# Altium PCB PCB1.PcbDoc
Units mm, origin at the board's own origin, x right, y up, seen from the top; angles counter-clockwise.
Board outline 133.46 x 100.89 mm, 2 copper layers (Top Layer, Bottom Layer); 42 components, 54 nets, 182 pads, 5 vias.
Unrouted connection lines stored in the file: 5.
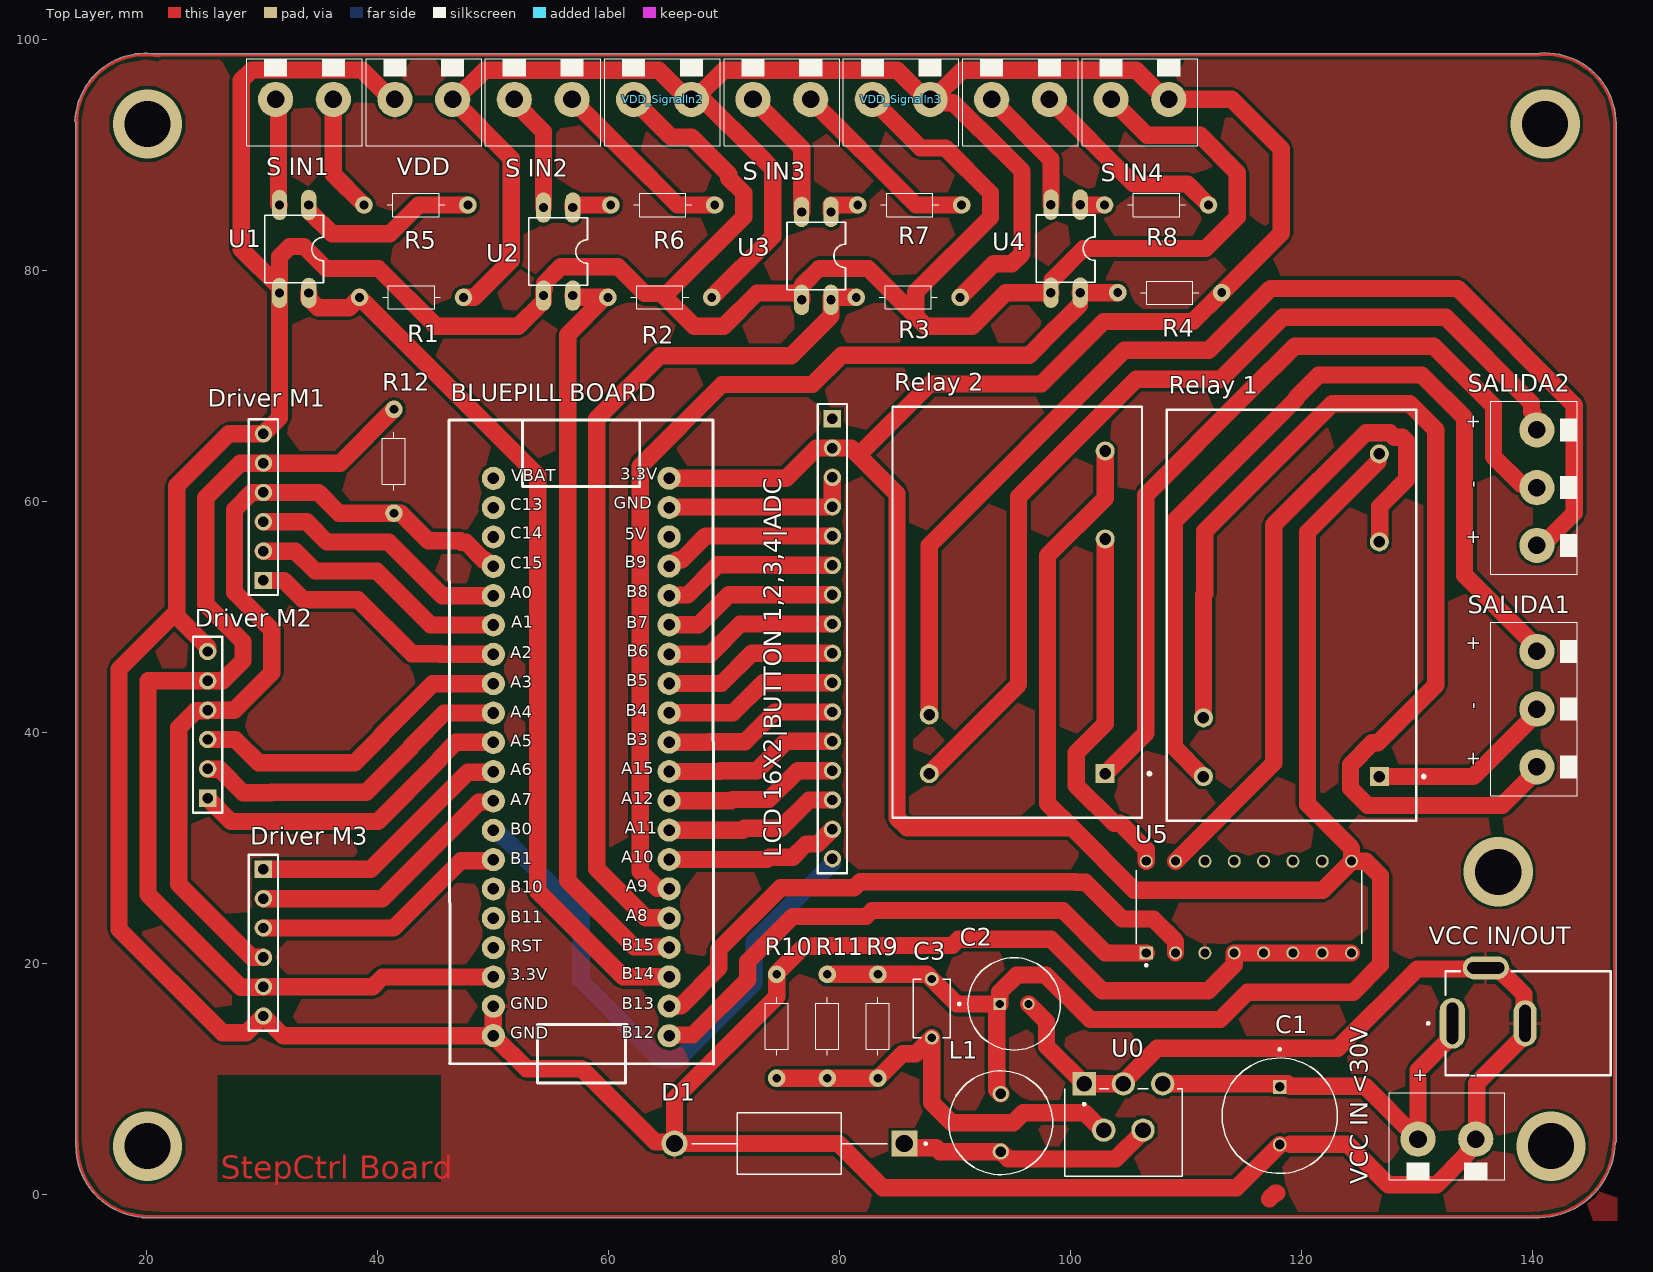
[diagram p0: Top Layer view]
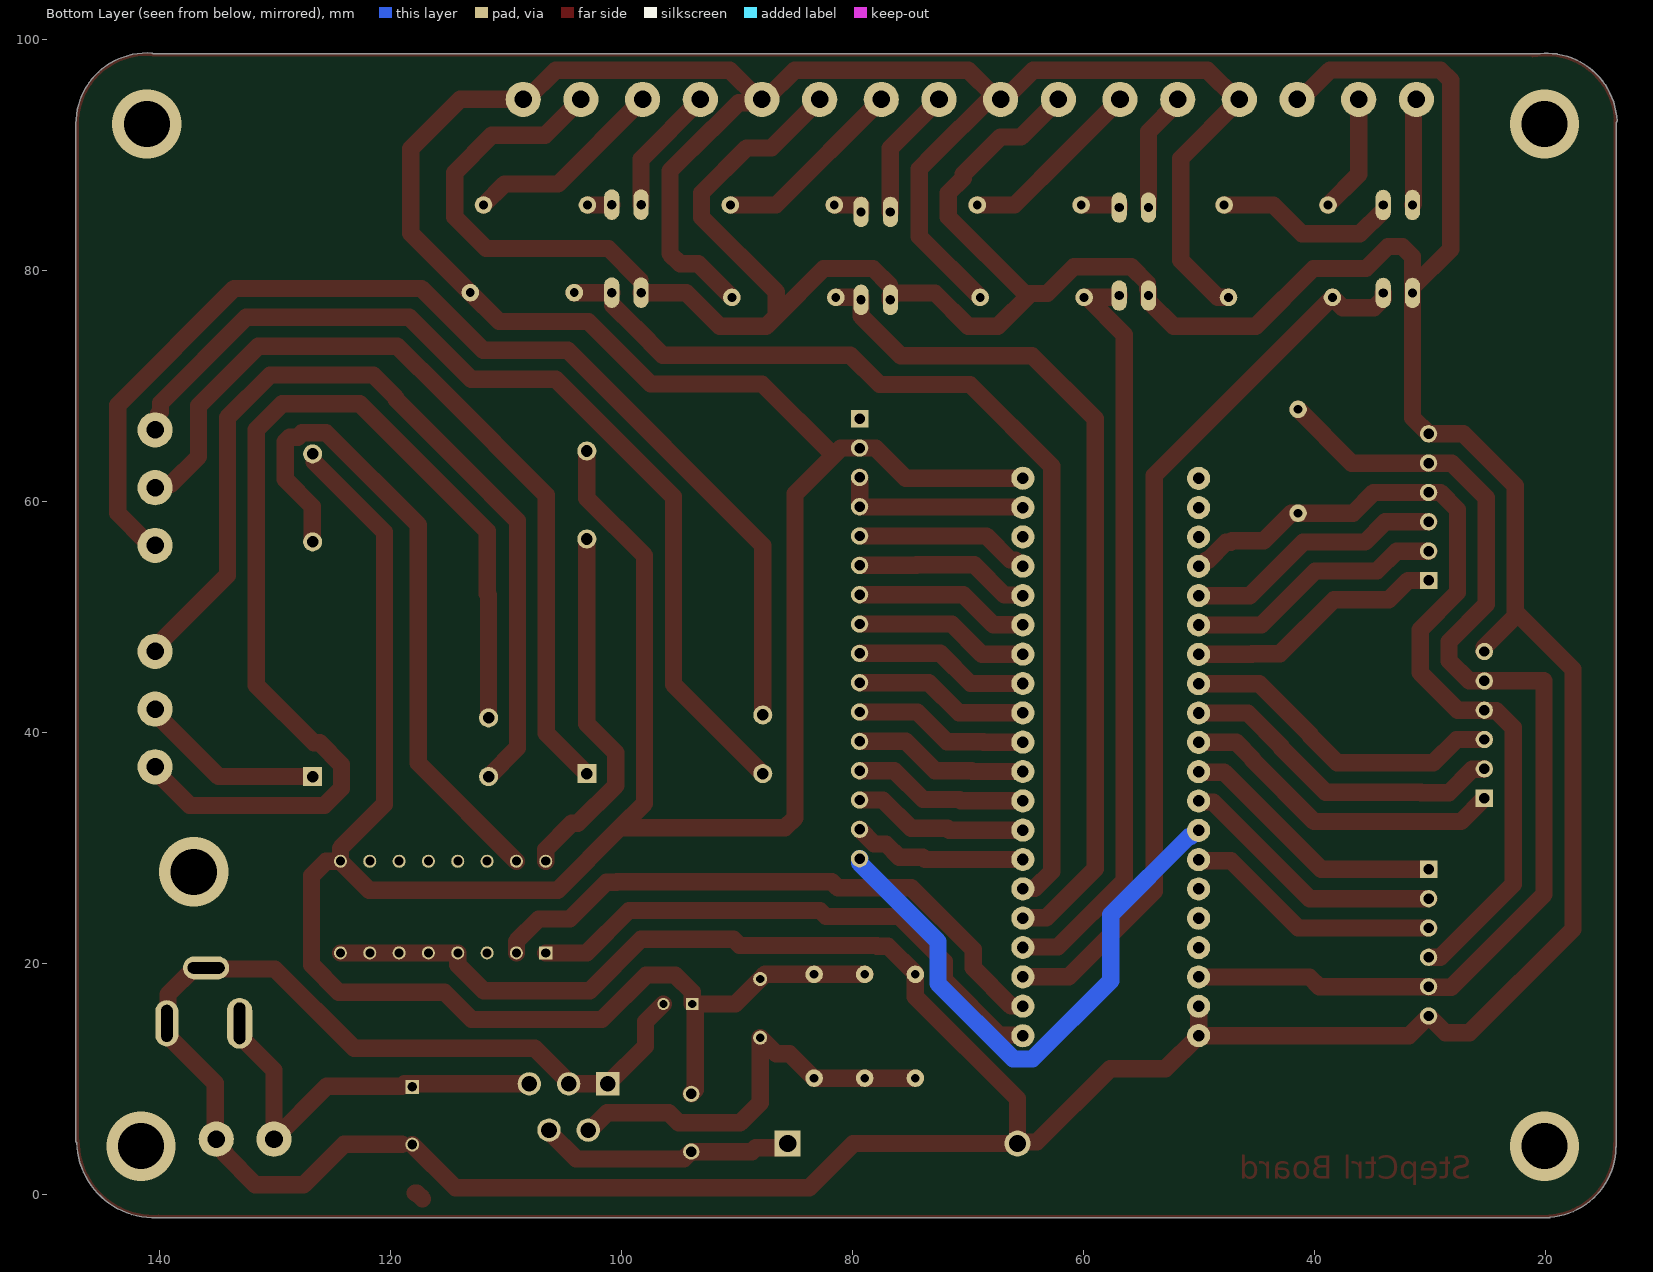
[diagram p1: Bottom Layer view, seen from below]
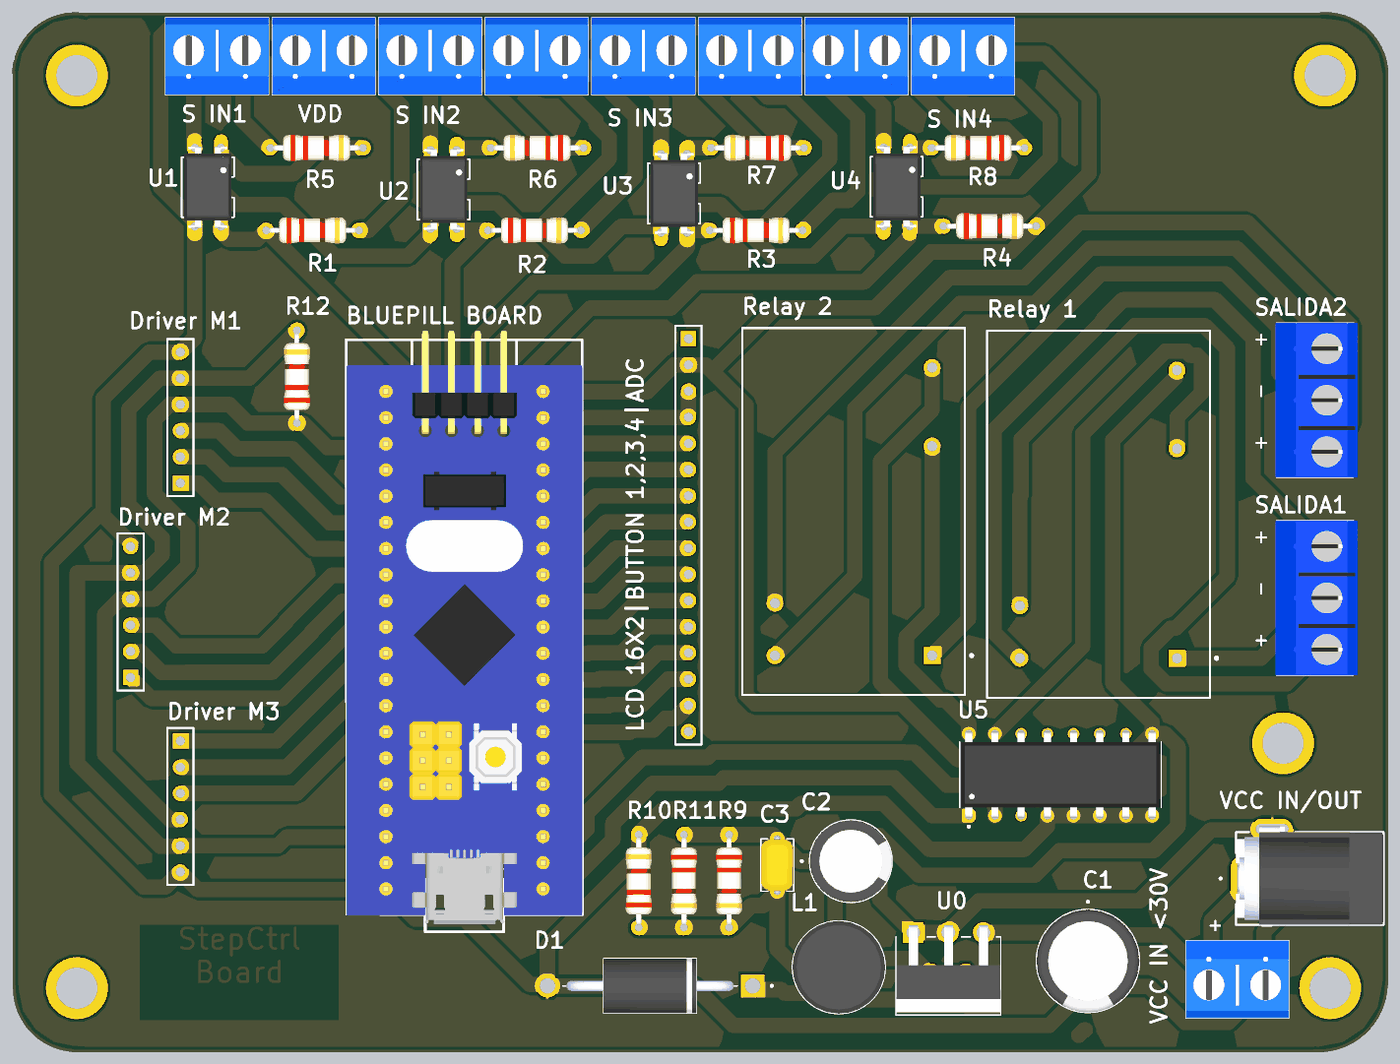
[diagram p2: 3D render of the assembled board from above, using the file's embedded part models]

## Layer stack, top to bottom
Top Solder: solder mask 0.0102, Solder Resist, Dk 3.5
Top Layer: signal copper 0.0356
Dielectric 1: dielectric 0.32, FR-4, Dk 4.8
Bottom Layer: signal copper 0.0356
Bottom Solder: solder mask 0.0102, Solder Resist, Dk 3.5

## Board outline
13.843,4.191 13.843,92.843 cw(c13.911,92.951) 13.784,92.956 cw(c19.906,92.7) 18.945,98.752 cw(c19.05,98.679) 19.05,98.806 19.397,98.806 cw(c19.906,92.7) 20.415,98.806 140.583,98.806 cw(c140.668,98.712) 140.659,98.839 cw(c141.097,92.71) 147.242,92.71 147.242,4.62 cw(c147.114,4.62) 147.174,4.508 cw(c140.462,4.699) 140.657,-2.012 cw(c140.589,-1.905) 140.589,-2.032 19.685,-2.032 cw(c19.685,-1.905) 19.579,-1.976 cw(c20.066,4.191) 13.88,4.1 cw(c13.97,4.191)

## Design rules (kind name [scope] priority, off if disabled: settings)
Clearance [All] p1: gap=0.254 ignorepadtopadclearanceinfootprint=FALSE except(0: Arc-Hole Track-Hole SMDPad-Hole THPad-Hole Via-Hole Fill-Hole Poly-Hole Region-Hole Text-Hole; 1: Arc-Arc Arc-Track Track-Track)
PolygonConnect [All] p1: connectstyle=Relief reliefconductorwidth=0.254 reliefentries=4 polygonreliefangle="90 Angle" airgapwidth=0.254
RoomDefinition Placa_Main [InComponentClass('Placa_Main')] p1: confinementstyle=ConfineIn formatcopy=TRUE lockcomponents=FALSE outline 13.843,-2.032 147.193,-2.032 147.193,98.806 13.843,98.806
RoutingVias [All] p1: holewidth=0.711 width=1.27 viastyle="Through Hole" minholewidth=0.711 minwidth=1.27 maxholewidth=0.711 maxwidth=1.27
SolderMaskExpansion [All] p1: expansion=0.102 istentingtop=FALSE
Width [All] p1: maxlimit=2 minlimit=1 preferedwidth=1.5 minimp=50.000000 maximp=50.000000 favimp=50.000000
30 further rules are at their usual default settings.

## Classes and differential pairs
component class Placa_Main: "BLUEPILL BOARD" C1 C2 C3 D1 "Driver M1" "Driver M2" "Driver M3" L1 "LCD 16X2" R1 R2 R3 R4 R5 R6 R7 R8 R9 R10 R11 R12 "Relay 1" "Relay 2" "S IN1" "S IN3" "S IN4" SALIDA1 SALIDA2 "SIGNAL IN2" U0 U1 U2 U3 U4 U5 "VCC IN <30V" "VCC IN/OUT" VDD

## Components (designator, comment, footprint, x,y, rotation, side; value= is the part's Value field where it differs from the comment)
"BLUEPILL BOARD" "STM32F103C8T6" "Stm32 BluePill" 57.404,43.655 r0 top
C1 "470uFX50v" CAPPRD500W60D1000H2000 118.11,6.825 r270 top
C2 "220uF x 10v" CAPPRD250W45D800H500 95.114,16.503 r0 top
C3 "470nF" "CERAMIC CAPACITOR" 87.982,16.122 r90 top
D1 "1N5820G" DIOAD1990W125L900D530 75.648,4.412 r180 top
"Driver M1" "" HDR1X6 30.099,53.18 r90 top
"Driver M2" "" HDR1X6 25.273,34.32 r90 top
"Driver M3" "" HDR1X6 30.099,28.161 r270 top
L1 "33uH" IND_RLB9012-681KL 93.951,6.216 r270 top
"LCD 16X2|BUTTON 1,2,3,4|ADC" "Header 16" HDR1X16 79.375,67.183 r270 top (schematic designator "LCD 16X2")
R1 "330R" 330R_P8mm_0.25W 42.926,77.691 r180 top
R2 "330R" 330R_P8mm_0.25W 64.431,77.691 r180 top
R3 "330R" 330R_P8mm_0.25W 85.937,77.691 r180 top
R4 "330R" 330R_P8mm_0.25W 108.585,78.105 r180 top
R5 "100 ohm" 330R_P8mm_0.25W 43.307,85.692 r180 top
R6 "100 ohm" 330R_P8mm_0.25W 64.685,85.692 r0 top
R7 "100 ohm" 330R_P8mm_0.25W 86.064,85.692 r0 top
R8 "100 ohm" 330R_P8mm_0.25W 107.442,85.692 r0 top
R9 "1.7K" 330R_P8mm_0.25W 83.312,14.572 r90 top
R10 "1K" 330R_P8mm_0.25W 74.549,14.572 r270 top
R11 "ONLY IF YOU" 330R_P8mm_0.25W 78.93,14.572 r90 top
R12 "100 ohm" 330R_P8mm_0.25W 41.402,63.5 r270 top
"Relay 1" "3.3v" MODULE5B 119.126,50.165 r90 top
"Relay 2" "3.3v" MODULE5B 95.377,50.419 r90 top
"S IN1" "" CONN2 33.655,94.836 r180 top (schematic designator "SIGNAL IN1")
"S IN2" "" CONN2 54.326,94.836 r180 top (schematic designator "SIGNAL IN2")
"S IN3" "" CONN2 74.998,94.836 r180 top (schematic designator "SIGNAL IN3")
"S IN4" "" CONN2 95.669,94.836 r180 top (schematic designator "SIGNAL IN4")
SALIDA1 "" CONN3 140.383,39.537 r90 top
SALIDA2 "" CONN3 140.383,58.714 r90 top
U0 "LM2596T-ADJ/NOPB" TO170P1016X470X2092-5 101.17,9.581 r0 top
U1 "PC817" DIL04 32.766,81.882 r180 top
U2 "PC817" DIL04 55.626,81.661 r180 top
U3 "PC817" DIL04 77.978,81.28 r180 top
U4 "PC817" DIL04 99.568,81.915 r180 top
U5 "ULN2003AN" DIP794W45P254L1969H508Q16 115.443,24.892 r90 top
"VCC IN <30V" "" CONN2 132.588,4.793 r0 top
"VCC IN/OUT" "DCJ200" GCT_DCJ200-10-A-XX-K_REVA 139.616,14.828 r90 top
VDD "" CONN2 43.991,94.836 r180 top (schematic designator VDD_SignalIn1)
VDD_SignalIn2 "" CONN2 64.662,94.836 r180 top
VDD_SignalIn3 "" CONN2 85.334,94.836 r180 top
VDD_SignalIn4 "" CONN2 106.005,94.836 r180 top

## Footprints (in the part's own frame and the unit in brackets; to place one, negate y for a bottom-side part, rotate by r counter-clockwise, add the part's x,y. Pads: shape width x height; smd on the part's side, far side on the other; paste and mask are expansions set on the pad)
330R_P8mm_0.25W [mil]
  round 60 hole 30: 1(-177.17,0) 2(177.17,0)
  silkscreen extent -98,-39 98,39, body extent -167,-50 167,50, height 104
CAPPRD250W45D800H500 [mm]
  round 1.05 hole 0.7: N(1.25,0)
  rect 1.05x1.05 hole 0.7: P(-1.25,0)
  silkscreen extent -4.85,-4 4,4, body extent -4,-4 4,4, height 5
CAPPRD500W60D1000H2000 [mm]
  round 1.2 hole 0.85: N(2.5,0)
  rect 1.2x1.2 hole 0.85: P(-2.5,0)
  silkscreen extent -5.85,-5 5,5, body extent -5,-5 5,5, height 20
"CERAMIC CAPACITOR" [mm]
  round 1.218 hole 0.71: 1(-2.54,0) 2(2.54,0)
  silkscreen extent -2.54,-1.59 2.54,1.59, body extent -2.79,-1.59 2.79,1.59, height 5.86
CONN2 [mil]
  round 120 hole 60: 1(-98.43,0) 2(98.43,0)
  silkscreen extent -197,-138 197,157, body extent -197,-138 197,157, height 394
CONN3 [mil]
  round 120 hole 60: 1(-98.43,0) 2(98.43,0) 3(295.28,0)
  silkscreen extent -197,-138 394,157, body extent -197,-154 394,161, height 394
DIL04 [mil]
  oval 52x104 hole 32: 1(-50,-150) 2(50,-150) 3(50,150) 4(-50,150)
  silkscreen extent -100,-115 100,115, body extent -91,-155 91,155, height 179
DIOAD1990W125L900D530 [mm]
  round 2.25 hole 1.5: A(9.95,0)
  rect 2.25x2.25 / inner round 2.25 / far side rect 2.25x2.25 hole 1.5: C(-9.95,0)
  silkscreen extent -11.9,-2.65 8.47,2.65, body extent -8.13,-2.65 8.13,2.65, height 5.3
DIP794W45P254L1969H508Q16 [mm]
  rect 1.13x1.13 / inner round 1.13 / far side rect 1.13x1.13 hole 0.78: 1(-3.97,8.89)
  round 1.13 hole 0.78: 2(-3.97,6.35) 3(-3.97,3.81) 4(-3.97,1.27) 5(-3.97,-1.27) 6(-3.97,-3.81) 7(-3.97,-6.35) 8(-3.97,-8.89) 9(3.97,-8.89) 10(3.97,-6.35) 11(3.97,-3.81) 12(3.97,-1.27) 13(3.97,1.27) 14(3.97,3.81) 15(3.97,6.35) 16(3.97,8.89)
  silkscreen extent -5.13,-9.77 3.18,9.77, body extent -4.15,-9.65 4.15,9.65, height 5.08
GCT_DCJ200-10-A-XX-K_REVA [mm]
  oval 4.4x2.2 hole 1 slot 3.6 at 0 deg: 1(0,6.55)
  oval 4x2 hole 1 slot 3.2 at 0 deg: 2(0,0.25)
  oval 2x4 hole 1 slot 3.2 at 90 deg: 3(4.8,3.65)
  silkscreen extent -4.5,-7.15 4.5,8.75, body extent -4.5,-7.15 5.05,7.15, height 11
HDR1X6 [mm] "Connector; Header; 6 Position"
  rect 1.5x1.5 hole 0.9: 1(0,0)
  round 1.5 hole 0.9: 2(2.54,0) 3(5.08,0) 4(7.62,0) 5(10.16,0) 6(12.7,0)
  silkscreen extent -1.27,-1.27 13.97,1.27
HDR1X16 [mm] "Connector; Header; 16 Position"
  rect 1.5x1.5 hole 0.9: 1(0,0)
  round 1.5 hole 0.9: 2(2.54,0) 3(5.08,0) 4(7.62,0) 5(10.16,0) 6(12.7,0) 7(15.24,0) 8(17.78,0) 9(20.32,0) 10(22.86,0) 11(25.4,0) 12(27.94,0) 13(30.48,0) 14(33.02,0) 15(35.56,0) 16(38.1,0)
  silkscreen extent -1.27,-1.27 39.37,1.27
IND_RLB9012-681KL [mm]
  round 1.408 hole 0.9: 1(-2.5,0) 2(2.5,0)
  silkscreen extent -4.5,-4.5 4.5,4.5, body extent -4.5,-4.5 4.5,4.5, height 12.2
MODULE5B [mm] "DIP; 5 Round Pins; Row Space 15.24 mm; Pitch 2.54 mm"
  rect 1.65x1.65 hole 1: 1(-13.97,-7.62)
  round 1.65 hole 1: 2(-13.97,7.62) 3(-8.89,7.62) 4(13.97,-7.62) 5(6.35,-7.62)
  silkscreen extent -17.8,-11.58 17.8,10.8, body extent -17.8,-10.8 17.8,10.8, height 14
"Stm32 BluePill" [mm]
  round 2 hole 1: 1(7.828,-29.909) 2(7.828,-27.343) 3(7.828,-24.803) 4(7.828,-22.263) 5(7.828,-19.723) 6(7.828,-17.183) 7(7.828,-14.643) 8(7.828,-12.103) 9(7.828,-9.563) 10(7.828,-7.023) 11(7.828,-4.483) 12(7.828,-1.943) 13(7.828,0.597) 14(7.828,3.137) 15(7.828,5.677) 16(7.828,8.217) 17(7.828,10.757) 18(7.828,13.297) 19(7.828,15.837) 20(7.828,18.377) 21(-7.386,18.366) 22(-7.386,15.826) 23(-7.386,13.286) 24(-7.386,10.746) 25(-7.386,8.206) 26(-7.386,5.666) 27(-7.386,3.126) 28(-7.386,0.586) 29(-7.386,-1.954) 30(-7.386,-4.494) 31(-7.386,-7.034) 32(-7.386,-9.574) 33(-7.386,-12.114) 34(-7.386,-14.654) 35(-7.386,-17.194) 36(-7.386,-19.734) 37(-7.386,-22.274) 38(-7.386,-24.814) 39(-7.386,-27.354) 40(-7.386,-29.894)
  silkscreen extent -11.22,-34 11.69,23.43, body extent -11.18,-33.27 11.68,24.29, height 12.31
TO170P1016X470X2092-5 [mm]
  round 2.025 hole 1.35: 1(6.8,0) 2(5.1,-4) 3(3.4,0) 4(1.7,-4)
  rect 2.025x2.025 / inner round 2.025 / far side rect 2.025x2.025 hole 1.35: 5(0,0)
  silkscreen extent -1.68,-8 8.48,-0.42, body extent -1.66,-7.74 8.5,0.74, height 20.93

## Part data
"BLUEPILL BOARD": library part BluePill, "Designed By @Alixahedi"
C1: library part CAP-470uFX50v, "470ÂµF 50V Aluminum Electrolytic Capacitors Radial, Can 2000 Hrs @ 105Â°C", Package="RADIAL-2 Panasonic", Availability="Not in stock", Check_prices=https://www.snapeda.com/parts/EEUHD1H471/Panasonic/view-part/5785983/?ref=eda, MF=Panasonic, MP=EEUHD1H471, Price=None, SnapEDA_Link=https://www.snapeda.com/parts/EEUHD1H471/Panasonic/view-part/5785983/?ref=snap
C2: library part ECEA1AKS221I, "CAP ALUM 220UF 20% 10V RADIAL", Package="RADIAL-2 Panasonic", Availability="In Stock", Check_prices=https://www.snapeda.com/parts/ECE-A1AKS221I/Panasonic/view-part/2339032/?ref=eda, MF=Panasonic, MP=ECE-A1AKS221I, Price=None, Purchase-URL=https://pricing.snapeda.com/search/part/ECE-A1AKS221I/?ref=eda, SnapEDA_Link=https://www.snapeda.com/parts/ECE-A1AKS221I/Panasonic/view-part/2339032/?ref=snap
C3: library part SR655C474MARTR1, "SR Series 7.62 x 7.62 mm 470 nF 50 V Â±20 % Tolerance X7R Radial Lead/SkyCapÂ®", Package="Radial AVX", Check_prices=https://www.snapeda.com/parts/SR655C474MARTR1/AVX/view-part/?ref=eda, MF=AVX, MP=SR655C474MARTR1, SnapEDA_Link=https://www.snapeda.com/parts/SR655C474MARTR1/AVX/view-part/?ref=snap
D1: "ON Semi 1N5820G, Schottky Diode, 20V 3A, 2-Pin DO-201AD", Package="AXIAL LEAD-2 ON Semiconductor", Check_prices=https://www.snapeda.com/parts/1N5820G/Onsemi/view-part/?ref=eda, MF="ON Semiconductor", MP=1N5820G, SnapEDA_Link=https://www.snapeda.com/parts/1N5820G/Onsemi/view-part/?ref=snap
"Driver M1" "Driver M2" "Driver M3": library part "Header 6", "step,dir,enable,fault,vdd", LatestRevisionDate=17-Jul-2002, LatestRevisionNote="Re-released for DXP Platform.", Publisher="Altium Limited"
L1: library part RLB9012-681KL, Package=None, Availability=Unavailable, MP=RLB9012-681KL, Price=None
"LCD 16X2|BUTTON 1,2,3,4|ADC": "Header, 16-Pin", LatestRevisionDate=17-Jul-2002, LatestRevisionNote="Re-released for DXP Platform.", Publisher="Altium Limited"
R1 R2 R3 R4 R5 R6 R7 R8 R9 R10 R11 R12: library part 330R_0.25W
"Relay 1" "Relay 2": library part Relay-SPDT, "Single-Pole Dual-Throw Relay", LatestRevisionDate=17-Jul-2002, LatestRevisionNote="Re-released for DXP Platform.", PackageReference=MODULE5B, Published=24-Mar-1999, Publisher="Altium Limited"
"S IN1" "S IN2" "S IN3" "S IN4" "VCC IN <30V" VDD VDD_SignalIn2 VDD_SignalIn3 VDD_SignalIn4: library part Bornera_2C
SALIDA1 SALIDA2: library part Bornera_3C
U0: "SIMPLE SWITCHERÂ® 4.5V to 40V, 3A Low Component Count Step-Down Regulator", Package="TO-220-5 Texas Instruments", Check_prices=https://www.snapeda.com/parts/LM2596T-ADJ/NOPB/Texas+Instruments/view-part/?ref=eda, MF="Texas Instruments", MP=LM2596T-ADJ/NOPB, SnapEDA_Link=https://www.snapeda.com/parts/LM2596T-ADJ/NOPB/Texas+Instruments/view-part/?ref=snap
U1 U2 U3 U4: library part PC817X3NSZ9F, "Optoisolator Transistor Output 5000Vrms 1 Channel 4-DIP", Package="DIP-4 Sharp Microelectronics", Check_prices=https://www.snapeda.com/parts/PC817X3NSZ9F/Sharp+Microelectronics/view-part/?ref=eda, MF="Sharp Microelectronics", MP=PC817X3NSZ9F, SnapEDA_Link=https://www.snapeda.com/parts/PC817X3NSZ9F/Sharp+Microelectronics/view-part/?ref=snap
U5: "50-V, 7-ch darlington transistor array, -20C to 70C", Package="PDIP-16 Texas Instruments", Check_prices=https://www.snapeda.com/parts/ULN2003AN/Texas+Instruments/view-part/?ref=eda, MF="Texas Instruments", MP=ULN2003AN, SnapEDA_Link=https://www.snapeda.com/parts/ULN2003AN/Texas+Instruments/view-part/?ref=snap
"VCC IN/OUT": library part DCJ200-10-A-XX-K_REVA, "Power Barrel Connector Jack 2.05mm ID (0.081), 5.50mm OD (0.217) Through Hole, Right Angle", Package=None, Check_prices=https://www.snapeda.com/parts/DCJ200-10-A-K1-K/Global+Connector+Technology/view-part/?ref=eda, MF="Global Connector Technology", MP=DCJ200-10-A-K1-K, SnapEDA_Link=https://www.snapeda.com/parts/DCJ200-10-A-K1-K/Global+Connector+Technology/view-part/?ref=snap

## Via types
v1: diameter 6, hole 4, Top Layer to Bottom Layer, 5 vias

## Nets (pads, with @x,y where several pads share a name; then routed paths per layer and width w, separated by ;. In a path a pad name is that pad's centre, name@x,y a point inside that pad or via, vN(x,y) a via of type N, cw(c..) or ccw(c..) an arc to the next point about the centre after c; other vN are vias at no path point)
+3.3v: "BLUEPILL BOARD.20" "BLUEPILL BOARD.38" "Driver M1.5" "Driver M2.5" "Driver M3.5" "LCD 16X2|BUTTON 1,2,3,4|ADC.2" "Relay 1.4" "Relay 2.4" C2.P C3.2 L1.1 R1.1 R2.1 R3.1 R4.1 R9.2 R11.2 R12.1 U5.9 VDD.1 VDD_SignalIn2.1 VDD_SignalIn3.1 VDD_SignalIn4.1 | length 536.5
  Top Layer w1.5: R12.1 36.742,63.34 28.108,63.34 25.099,60.331 25.099,51.109 28.33,47.878 28.33,46.237 26.573,44.48 25.273,44.48 20.129,44.48 20.099,44.45 20.099,26.01 28.148,17.961 30.059,17.961 30.099,18.001 39.571,18.001 40.411,18.841 50.018,18.841 ; R1.1 47.431,77.696 48.359,77.696 51.562,80.899 51.562,89.716 46.442,94.836 46.723,94.836 49.251,97.364 64.334,97.364 66.497,95.201 66.778,95.201 67.171,94.808 68.207,94.808 72.898,90.117 74.208,88.807 74.208,82.968 R2.1 ; 65.232,62.032 75.367,62.032 77.978,64.643 81.006,64.643 84.963,60.686 84.963,32.629 85.842,31.75 100.129,31.75 ; VDD_SignalIn2.1@67.801,95.213 69.952,97.364 84.995,97.364 87.523,94.836 VDD_SignalIn3.1@87.804,94.836 ; R11.2 R9.2 87.572,19.072 C3.2 90.141,16.503 C2.P ; 81.681,64.048 87.824,70.191 97.455,70.191 102.869,75.605 110.585,75.605 R4.1 118.237,83.257 118.237,90.551 113.952,94.836 108.505,94.836 108.224,94.836 105.696,97.364 90.613,97.364 88.085,94.836 VDD_SignalIn3.1@87.804,94.836 ; R3.1 93.351,80.605 94.919,80.605 95.798,81.484 95.798,88.633 92.123,92.308 92.084,92.308 89.849,94.543 88.097,94.543 VDD_SignalIn3.1@87.804,94.836 ; L1.1 93.599,9.068 93.599,16.238 C2.P ; 102.968,64.348 102.997,64.32 102.997,60.305 97.997,55.305 97.997,33.882 100.129,31.75 ; 126.619,63.467 120.523,57.371 120.523,33.782 124.333,29.972 U5.9 ; C2.P 93.864,17.539 95.328,19.003 97.864,19.003 101.714,15.153 112.956,15.153 115.322,17.52 124.466,17.52 126.833,19.886 126.833,27.605 125.576,28.862 U5.9 ; 100.129,31.75 105.517,26.362 121.833,26.362 U5.9
GND: "BLUEPILL BOARD.19" "BLUEPILL BOARD.39" "BLUEPILL BOARD.40" "Driver M1.6" "Driver M2.6" "Driver M3.6" "LCD 16X2|BUTTON 1,2,3,4|ADC.3" "LCD 16X2|BUTTON 1,2,3,4|ADC.4" "VCC IN <30V.2" "VCC IN/OUT.2" "VCC IN/OUT.3" C1.N C2.N D1.A R10.1 U0.3 U0.5 U1.3 U2.3 U3.3 U4.3 U5.3 U5.4 U5.5 U5.6 U5.7 U5.8 VDD.2 VDD_SignalIn2.2 VDD_SignalIn3.2 VDD_SignalIn4.2 | length 662.9
  Top Layer w0.254: 140.075,-1.877 ccw(c140.462,4.699) 147.049,4.699 ; 147.114,4.62 147.114,92.71
  Top Layer w1.5: 25.273,47.02 25.273,47.399 22.599,50.073 ; VDD.2@41.442,94.836 41.185,94.836 38.645,97.376 29.073,97.376 28.194,96.497 28.194,81.855 U1.3@31.496,78.553 ; 50.018,16.301 50.018,13.761 ; VDD_SignalIn2.2@62.143,94.836 65.391,91.588 67.167,91.588 70.398,88.357 70.398,88.015 71.685,86.728 71.685,84.656 65.054,78.025 64.563,78.025 ; 65.232,59.492 65.272,59.532 79.344,59.532 79.375,59.563 79.375,62.103 ; U3.3 76.708,77.818 76.454,78.072 72.848,78.072 69.967,75.191 67.397,75.191 64.563,78.025 ; U3.3@76.798,78.776 78.212,80.191 82.472,80.191 86.602,76.061 ; VDD_SignalIn3.2@82.804,94.836 87.006,90.634 89.158,90.634 93.064,86.728 93.064,84.625 86.602,78.164 86.602,76.061 ; C2.N 97.917,14.95 97.917,12.834 U0.5 U0.3 104.57,9.717 107.506,12.653 123.135,12.653 130.014,19.532 135.871,19.532 135.966,19.628 ; U4.3 94.386,78.105 91.472,75.191 87.472,75.191 86.602,76.061 ; U4.3@98.388,79.19 101.121,81.923 111.709,81.923 114.442,84.656 114.442,88.497 111.219,91.72 106.621,91.72 VDD_SignalIn4.2 ; 117.221,-0.381 117.729,0.127 117.856,0.127 ; C1.N 114.366,0.581 83.747,0.581 79.916,4.412 D1.A ; 118.999,4.365 124.017,4.365 127.526,0.856 131.699,0.856 134.314,3.471 134.314,3.6 135.182,4.468 135.182,9.644 139.366,13.828 139.366,14.828 139.271,14.923 139.271,17.323 136.966,19.628 136.216,19.628 ; U5.8 U5.7 U5.6 U5.5 U5.4 114.173,19.906 111.92,17.653 102.75,17.653 98.305,22.098 90.297,22.098 89.771,21.572 77.895,21.572 77.835,21.512 76.911,21.512 74.554,19.155 74.554,19.077 74.544,19.067 74.544,17.138 65.698,8.292 D1.A ; 22.599,50.073 22.599,61.367 27.112,65.88 30.099,65.88 31.496,67.277 U1.3 U1.3@31.496,78.553 ; 22.599,50.073 22.187,50.073 17.599,45.486 17.599,22.961 26.563,13.997 28.635,13.997 30.099,15.461 31.799,13.761 50.018,13.761 ; U1.3@31.496,78.553 31.496,81.215 32.375,82.094 33.617,82.094 35.52,80.191 40.063,80.191 45.063,75.191 52.177,75.191 54.356,77.37 54.356,78.332 54.446,78.422 54.446,78.936 55.86,80.351 60.807,80.351 63.133,78.025 64.563,78.025 ; 50.018,13.761 52.889,10.89 57.677,10.89 64.011,4.555 65.554,4.555 D1.A
"NetBLUEPILL BOARD_1": "BLUEPILL BOARD.1" U5.1 | length 48.3
  Top Layer w1.5: 65.232,13.746 65.298,13.812 67.263,13.812 72.044,18.593 72.044,20.181 75.935,24.072 82.285,24.072 82.811,24.598 99.341,24.598 103.017,20.922 U5.1
"NetBLUEPILL BOARD_2": "BLUEPILL BOARD.2" U5.2 | length 52.4
  Top Layer w1.5: 65.232,16.312 65.272,16.352 66.268,16.352 69.544,19.628 69.544,21.216 74.9,26.572 81.25,26.572 81.776,27.098 100.376,27.098 100.423,27.051 101.293,27.051 104.482,23.862 107.149,23.862 109.093,21.918 U5.2
"NetBLUEPILL BOARD_3": "BLUEPILL BOARD.3" R1.2 U1.4 | length 77.8
  Top Layer w1.5: U1.4 34.036,77.591 34.825,76.802 37.535,76.802 R1.2 R1.2 53.848,62.269 53.848,26.254 61.25,18.852 65.232,18.852
"NetBLUEPILL BOARD_4": "BLUEPILL BOARD.4" R2.2 U2.4 | length 66.4
  Top Layer w1.5: U2.4 57.056,77.691 57.25,77.691 R2.2 59.927,77.686 59.685,77.686 56.468,74.469 56.468,27.17 62.206,21.432 65.192,21.432 65.232,21.392
"NetBLUEPILL BOARD_5": "BLUEPILL BOARD.5" R3.2 U3.4 | length 74.6
  Top Layer w1.5: 65.232,23.932 65.192,23.972 63.201,23.972 58.968,28.205 58.968,67.172 64.445,72.648 75.823,72.648 79.248,76.073 U3.4 ; U3.4@79.248,77.691 R3.2
"NetBLUEPILL BOARD_6": "BLUEPILL BOARD.6" R4.2 U4.4 | length 85.3
  Top Layer w1.5: 65.232,26.472 65.192,26.512 64.197,26.512 62.732,27.976 62.732,63.067 69.813,70.148 77.641,70.148 80.184,72.691 96.414,72.691 98.728,75.005 98.733,75.005 U4.4@100.748,77.02 ; U4.4 R4.2
"NetBLUEPILL BOARD_7": "BLUEPILL BOARD.7" "LCD 16X2|BUTTON 1,2,3,4|ADC.15" | length 15.2
  Top Layer w1.5: 65.232,29.012 73.716,29.012 73.914,29.21 75.946,29.21 77.089,30.353 78.105,30.353 79.375,31.623
"NetBLUEPILL BOARD_8": "BLUEPILL BOARD.8" "LCD 16X2|BUTTON 1,2,3,4|ADC.14" | length 15.2
  Top Layer w1.5: 65.232,31.552 71.601,31.552 71.759,31.71 74.91,31.71 77.363,34.163 79.375,34.163
"NetBLUEPILL BOARD_9": "BLUEPILL BOARD.9" "LCD 16X2|BUTTON 1,2,3,4|ADC.13" | length 15.2
  Top Layer w1.5: 65.232,34.092 70.606,34.092 70.724,34.21 73.875,34.21 76.368,36.703 79.375,36.703
"NetBLUEPILL BOARD_10": "BLUEPILL BOARD.10" "LCD 16X2|BUTTON 1,2,3,4|ADC.12" | length 15.2
  Top Layer w1.5: 65.232,36.632 69.61,36.632 69.688,36.71 72.839,36.71 75.372,39.243 79.375,39.243
"NetBLUEPILL BOARD_11": "BLUEPILL BOARD.11" "LCD 16X2|BUTTON 1,2,3,4|ADC.11" | length 15.2
  Top Layer w1.5: 65.232,39.172 68.615,39.172 68.653,39.21 71.804,39.21 74.377,41.783 79.375,41.783
"NetBLUEPILL BOARD_12": "BLUEPILL BOARD.12" "LCD 16X2|BUTTON 1,2,3,4|ADC.10" | length 15.2
  Top Layer w1.5: 65.232,41.712 70.77,41.712 73.381,44.323 79.375,44.323
"NetBLUEPILL BOARD_13": "BLUEPILL BOARD.13" "LCD 16X2|BUTTON 1,2,3,4|ADC.9" | length 15.2
  Top Layer w1.5: 65.232,44.252 69.775,44.252 72.386,46.863 79.375,46.863
"NetBLUEPILL BOARD_14": "BLUEPILL BOARD.14" "LCD 16X2|BUTTON 1,2,3,4|ADC.8" | length 15.2
  Top Layer w1.5: 65.232,46.792 68.779,46.792 71.39,49.403 79.375,49.403
"NetBLUEPILL BOARD_15": "BLUEPILL BOARD.15" "LCD 16X2|BUTTON 1,2,3,4|ADC.7" | length 15.2
  Top Layer w1.5: 65.232,49.332 67.784,49.332 70.395,51.943 79.375,51.943
"NetBLUEPILL BOARD_16": "BLUEPILL BOARD.16" "LCD 16X2|BUTTON 1,2,3,4|ADC.6" | length 15.3
  Top Layer w1.5: 65.232,51.872 65.272,51.912 66.828,51.912 69.448,54.532 74.418,54.532 74.467,54.483 79.375,54.483
"NetBLUEPILL BOARD_17": "BLUEPILL BOARD.17" "LCD 16X2|BUTTON 1,2,3,4|ADC.5" | length 15.2
  Top Layer w1.5: 65.232,54.412 65.368,54.412 65.904,54.948 66.329,54.948 68.413,57.032 79.366,57.032 79.375,57.023
"NetBLUEPILL BOARD_24": "BLUEPILL BOARD.24" "Driver M1.4" "Driver M2.4" "Driver M3.4" R12.2 | length 74.7
  Top Layer w1.5: 30.099,20.541 29.103,20.541 22.773,26.871 22.773,40.436 24.237,41.9 25.233,41.9 25.273,41.94 27.569,41.94 30.83,45.201 30.83,48.914 27.599,52.144 27.599,59.296 29.103,60.8 34.847,60.8 36.647,59.001 41.401,59.001 41.407,58.995 41.993,58.995 44.38,56.609 47.117,56.609 47.244,56.482 47.643,56.482 49.188,54.937 49.346,54.937 49.882,54.401 50.018,54.401
"NetBLUEPILL BOARD_25": "BLUEPILL BOARD.25" "Driver M1.3" | length 22.6
  Top Layer w1.5: 30.099,58.26 33.852,58.26 35.611,56.501 40.366,56.501 ; 40.366,56.5 40.953,56.5 45.592,51.861 50.018,51.861
"NetBLUEPILL BOARD_26": "BLUEPILL BOARD.26" "Driver M1.2" | length 22.6
  Top Layer w1.5: 30.099,55.72 32.856,55.72 34.575,54.001 39.33,54.001 39.918,54 44.597,49.321 50.018,49.321
"NetBLUEPILL BOARD_27": "BLUEPILL BOARD.27" "Driver M1.1" | length 22.6
  Top Layer w1.5: 30.099,53.18 31.861,53.18 33.54,51.501 38.295,51.501 42.974,46.821 45.381,46.821 45.421,46.781 50.018,46.781
"NetBLUEPILL BOARD_28": "BLUEPILL BOARD.28" "Driver M2.3" | length 28.5
  Top Layer w1.5: 25.273,39.4 27.676,39.4 29.698,37.378 38.003,37.378 40.346,39.721 40.346,39.81 44.777,44.241 50.018,44.241
"NetBLUEPILL BOARD_29": "BLUEPILL BOARD.29" "Driver M2.2" | length 28.5
  Top Layer w1.5: 25.273,36.86 25.313,36.82 26.309,36.82 28.331,34.798 30.734,34.798 30.774,34.838 38.998,34.838 42.846,38.686 42.846,38.775 45.772,41.701 50.018,41.701
"NetBLUEPILL BOARD_30": "BLUEPILL BOARD.30" "Driver M2.1" | length 28.5
  Top Layer w1.5: 25.273,34.32 27.295,32.298 39.994,32.298 45.346,37.65 45.346,37.739 46.768,39.161 50.018,39.161
"NetBLUEPILL BOARD_31": "BLUEPILL BOARD.31" "Driver M3.1" | length 23.4
  Top Layer w1.5: 30.099,28.161 39.392,28.161 47.812,36.581 49.978,36.581 50.018,36.621
"NetBLUEPILL BOARD_32": "BLUEPILL BOARD.32" "Driver M3.2" | length 23.4
  Top Layer w1.5: 30.099,25.621 40.388,25.621 48.752,33.985 49.922,33.985 50.018,34.081
"NetBLUEPILL BOARD_33": "BLUEPILL BOARD.33" "LCD 16X2|BUTTON 1,2,3,4|ADC.16" | length 50.4
  Bottom Layer w1.5: 50.018,31.541 50.153,31.541 50.689,31.005 50.848,31.005 57.625,24.228 57.625,18.52 64.402,11.742 66.062,11.742 72.592,18.272 72.592,21.919 79.375,28.702 79.375,29.083
"NetBLUEPILL BOARD_34": "BLUEPILL BOARD.34" "Driver M3.3" | length 22.4
  Top Layer w1.5: 30.099,23.081 41.384,23.081 47.208,28.905 49.922,28.905 50.018,29.001
NetC1_P: "VCC IN <30V.1" "VCC IN/OUT.1" C1.P U0.1 | length 35.4
  Top Layer w1.5: U0.1 118.783,9.581 118.999,9.365 125.516,9.365 130.088,4.793 130.088,10.749 133.066,13.728 133.066,14.828
NetC3_1: C3.1 R9.1 R10.2 R11.1 U0.4 | length 37.1
  Top Layer w1.5: R10.2 R11.1@78.919,10.072 ; R11.1 R9.1 83.318,10.072 85.444,12.198 86.598,12.198 C3.1 87.982,7.958 89.724,6.216 95.045,6.216 95.908,7.079 101.23,7.079 102.728,5.581 U0.4
NetD1_C: D1.C L1.2 U0.2 | length 22.3
  Top Layer w1.5: D1.C 85.973,4.037 88.367,4.037 88.688,3.716 L1.2 94.586,3.081 103.906,3.081 106.27,5.445 U0.2
"NetLCD 16X2": "LCD 16X2|BUTTON 1,2,3,4|ADC.1"
NetR5_1: R5.1 U1.1 | length 15.5
  Top Layer w1.5: U1.1@34.126,85.121 36.055,83.192 41.061,83.192 43.561,85.692 R5.1
NetR5_2: "S IN1.1" R5.2 | length 10.2
  Top Layer w1.5: 36.155,94.836 36.155,88.344 R5.2
NetR6_1: R6.1 U2.1 | length 3.5
  Top Layer w1.5: U2.1 56.896,85.692 R6.1
NetR6_2: "S IN2.1" R6.2 | length 16.2
  Top Layer w1.5: 56.816,94.836 61.534,90.118 65.96,85.692 R6.2
NetR7_1: R7.1 U3.1 | length 2.9
  Top Layer w1.5: U3.1 79.248,85.692 R7.1
NetR7_2: "S IN3.1" R7.2 | length 16.9
  Top Layer w1.5: 77.47,94.836 86.614,85.692 R7.2
NetR8_1: R8.1 U4.1 | length 2.1
  Top Layer w1.5: U4.1 100.838,85.692 R8.1
NetR8_2: "S IN4.1" R8.2 | length 17.6
  Top Layer w1.5: 98.131,94.836 98.163,94.836 105.496,87.503 110.131,87.503 R8.2
"NetRelay 1_1": "Relay 1.1" SALIDA1.2 | length 16.4
  Top Layer w1.5: 126.746,36.195 134.874,36.195 SALIDA1.2@140.716,42.037
"NetRelay 1_2": "Relay 1.2" SALIDA1.3 | length 78.1
  Top Layer w1.5: 111.506,36.195 109.006,38.695 109.006,58.361 113.717,63.072 119.519,68.875 119.519,68.985 121.502,70.967 130.414,70.967 134.119,67.262 134.119,53.634 SALIDA1.3@140.716,47.037
"NetRelay 1_3": "Relay 1.3" SALIDA1.1 | length 94.6
  Top Layer w1.5: 111.506,41.275 111.506,51.89 111.633,52.017 111.633,57.453 114.752,60.572 122.647,68.467 129.379,68.467 131.619,66.227 131.619,44.116 126.619,39.116 126.131,39.116 124.246,37.231 124.246,35.159 125.71,33.695 137.374,33.695 SALIDA1.1@140.716,37.037
"NetRelay 1_5": "Relay 1.5" U5.15 | length 57.5
  Top Layer w1.5: U5.15 117.602,37.371 117.602,57.986 125.583,65.967 127.655,65.967 128.043,65.579 128.731,65.579 129.119,65.191 129.119,61.929 126.775,59.584 126.775,56.544 126.746,56.515
"NetRelay 2_1": "Relay 2.1" SALIDA2.2 | length 72.4
  Top Layer w1.5: 102.997,36.449 106.506,39.958 106.506,60.573 115.443,69.51 119.4,73.467 131.45,73.467 136.619,68.298 136.619,63.914 139.023,61.51 140.087,61.51 SALIDA2.2
"NetRelay 2_2": "Relay 2.2" SALIDA2.3 | length 83.7
  Top Layer w1.5: 87.757,36.449 95.497,44.189 95.497,60.413 105.689,70.605 113.003,70.605 118.365,75.967 132.485,75.967 139.908,68.544 139.908,67.784 140.087,67.605 140.087,66.929 140.506,66.51 SALIDA2.3@140.801,66.51
"NetRelay 2_3": "Relay 2.3" SALIDA2.1 | length 97.1
  Top Layer w1.5: 87.757,41.529 87.757,56.208 104.654,73.105 111.967,73.105 117.329,78.467 133.521,78.467 143.625,68.363 143.625,59.023 141.097,56.495 SALIDA2.1@141.097,56.214
"NetRelay 2_5": "Relay 2.5" U5.16 | length 31.8
  Top Layer w1.5: 102.997,56.769 102.997,40.764 100.497,38.264 100.497,35.413 103.773,32.138 104.293,32.138 106.553,29.878 U5.16
"NetSIGNAL IN1_2": "S IN1.2" U1.2 | length 9.3
  Top Layer w1.5: 31.155,94.836 31.406,94.585 31.406,85.782 U1.2
"NetSIGNAL IN2_2": "S IN2.2" U2.2 | length 10.4
  Top Layer w1.5: 51.816,94.836 51.816,94.579 54.356,92.039 U2.2
"NetSIGNAL IN3_2": "S IN3.2" U3.2 | length 11.5
  Top Layer w1.5: 72.47,94.836 76.708,90.598 U3.2
"NetSIGNAL IN4_2": "S IN4.2" U4.2 | length 11.3
  Top Layer w1.5: 93.131,94.836 98.298,89.669 U4.2
pads on no net: "BLUEPILL BOARD.18" "BLUEPILL BOARD.21" "BLUEPILL BOARD.22" "BLUEPILL BOARD.23" "BLUEPILL BOARD.35" "BLUEPILL BOARD.36" "BLUEPILL BOARD.37" U5.10 U5.11 U5.12 U5.13 U5.14
copper on no net: | length 362
  Top Layer w0.254: 13.911,92.951 cw(c19.906,92.7) 21.089,98.582 ; 13.97,4.191 13.97,93.091 ; 14.012,4.443 ccw(c20.066,4.191) 19.688,-1.856 ; 19.05,98.679 140.589,98.679 ; 19.685,-1.905 140.589,-1.905 ; v1@19.839,93.31 ccw(c19.685,93.218) v1@19.865,93.218 ; 140.668,98.712 cw(c141.097,92.71) 147.114,92.71
  other v1: 20.066,4.191 141.605,4.191 137.033,27.94 20.066,92.71 141.097,92.71

## Polygon pours and split planes (outlines as drawn)
GND on Top Layer "GND_L" (solid, pour order 0): 13.716,98.933 13.843,98.806 147.32,98.806 147.32,-2.286 13.716,-2.286

## Other copper
Top Layer:
  text "StepCtrl Board" at 26.416,1.357 h2

## Text inside footprints (layer, text, board x,y; h text height)
"BLUEPILL BOARD": Top Overlay "5V" at 61.397,56.349 h1.78; Top Overlay "B9" at 61.397,53.936 h1.78; Top Overlay "B8" at 61.524,51.396 h1.78; Top Overlay "3.3V" at 61.016,61.556 h1.78; Top Overlay "GND" at 60.452,59.041 h1.78; Top Overlay "A5" at 51.491,38.442 h1.78; Top Overlay "A2" at 51.491,46.093 h1.78; Top Overlay "A3" at 51.491,43.547 h1.78; Top Overlay "A4" at 51.491,40.963 h1.78; Top Overlay "RST" at 51.491,20.662 h1.78; Top Overlay "B10" at 51.491,25.792 h1.78; Top Overlay "B11" at 51.491,23.208 h1.78; Top Overlay "A6" at 51.491,35.952 h1.78; Top Overlay "A7" at 51.491,33.368 h1.78; Top Overlay "B0" at 51.491,30.822 h1.78; Top Overlay "B1" at 51.491,28.263 h1.78; Top Overlay "3.3V" at 51.491,18.198 h1.78; Top Overlay "B15" at 61.153,20.763 h1.78; Top Overlay "A8" at 61.46,23.329 h1.78; Top Overlay "A11" at 61.377,30.904 h1.78; Top Overlay "B3" at 61.524,38.543 h1.78; Top Overlay "A9" at 61.491,25.894 h1.78; Top Overlay "A15" at 61.09,36.054 h1.78; Top Overlay "A12" at 61.09,33.47 h1.78; Top Overlay "A10" at 61.09,28.383 h1.78; Top Overlay "VBAT" at 51.564,61.435 h1.78; Top Overlay "B5" at 61.524,43.649 h1.78; Top Overlay "B14" at 61.123,18.28 h1.78; Top Overlay "B7" at 61.524,48.684 h1.78; Top Overlay "B4" at 61.491,41.064 h1.78; Top Overlay "B6" at 61.554,46.214 h1.78; Top Overlay "C15" at 51.491,53.859 h1.78; Top Overlay "C13" at 51.491,58.914 h1.78; Top Overlay "C14" at 51.491,56.425 h1.78; Top Overlay "A0" at 51.491,51.294 h1.78; Top Overlay "A1" at 51.562,48.735 h1.78; Top Overlay "GND" at 51.491,15.709 h1.78; Top Overlay "B13" at 61.143,15.709 h1.78; Top Overlay "GND" at 51.491,13.143 h1.78; Top Overlay "B12" at 61.153,13.2 h1.78
SALIDA1: Top Overlay "-" at 135.383,42.037 h1.2 r90; Top Overlay "+" at 135.383,37.037 h1.2 r90; Top Overlay "+" at 135.383,47.037 h1.2 r90
SALIDA2: Top Overlay "+" at 135.383,66.214 h1.2 r90; Top Overlay "+" at 135.383,56.214 h1.2 r90; Top Overlay "-" at 135.383,61.214 h1.2 r90
"VCC IN <30V": Top Overlay "+" at 129.588,9.793 h1.2; Top Overlay "-" at 134.588,9.793 h1.2